# Altium PCB board_2.PcbDoc (part 4 of 4)
Units mm, origin at the board's own origin, x right, y up, seen from the top; angles counter-clockwise.
Board outline 144.25 x 129 mm, 8 copper layers (Top Layer, PWR, Layer2, Layer3, Layer4, Layer5, GND, Bottom Layer); 112 components, 273 nets, 1028 pads, 798 vias.
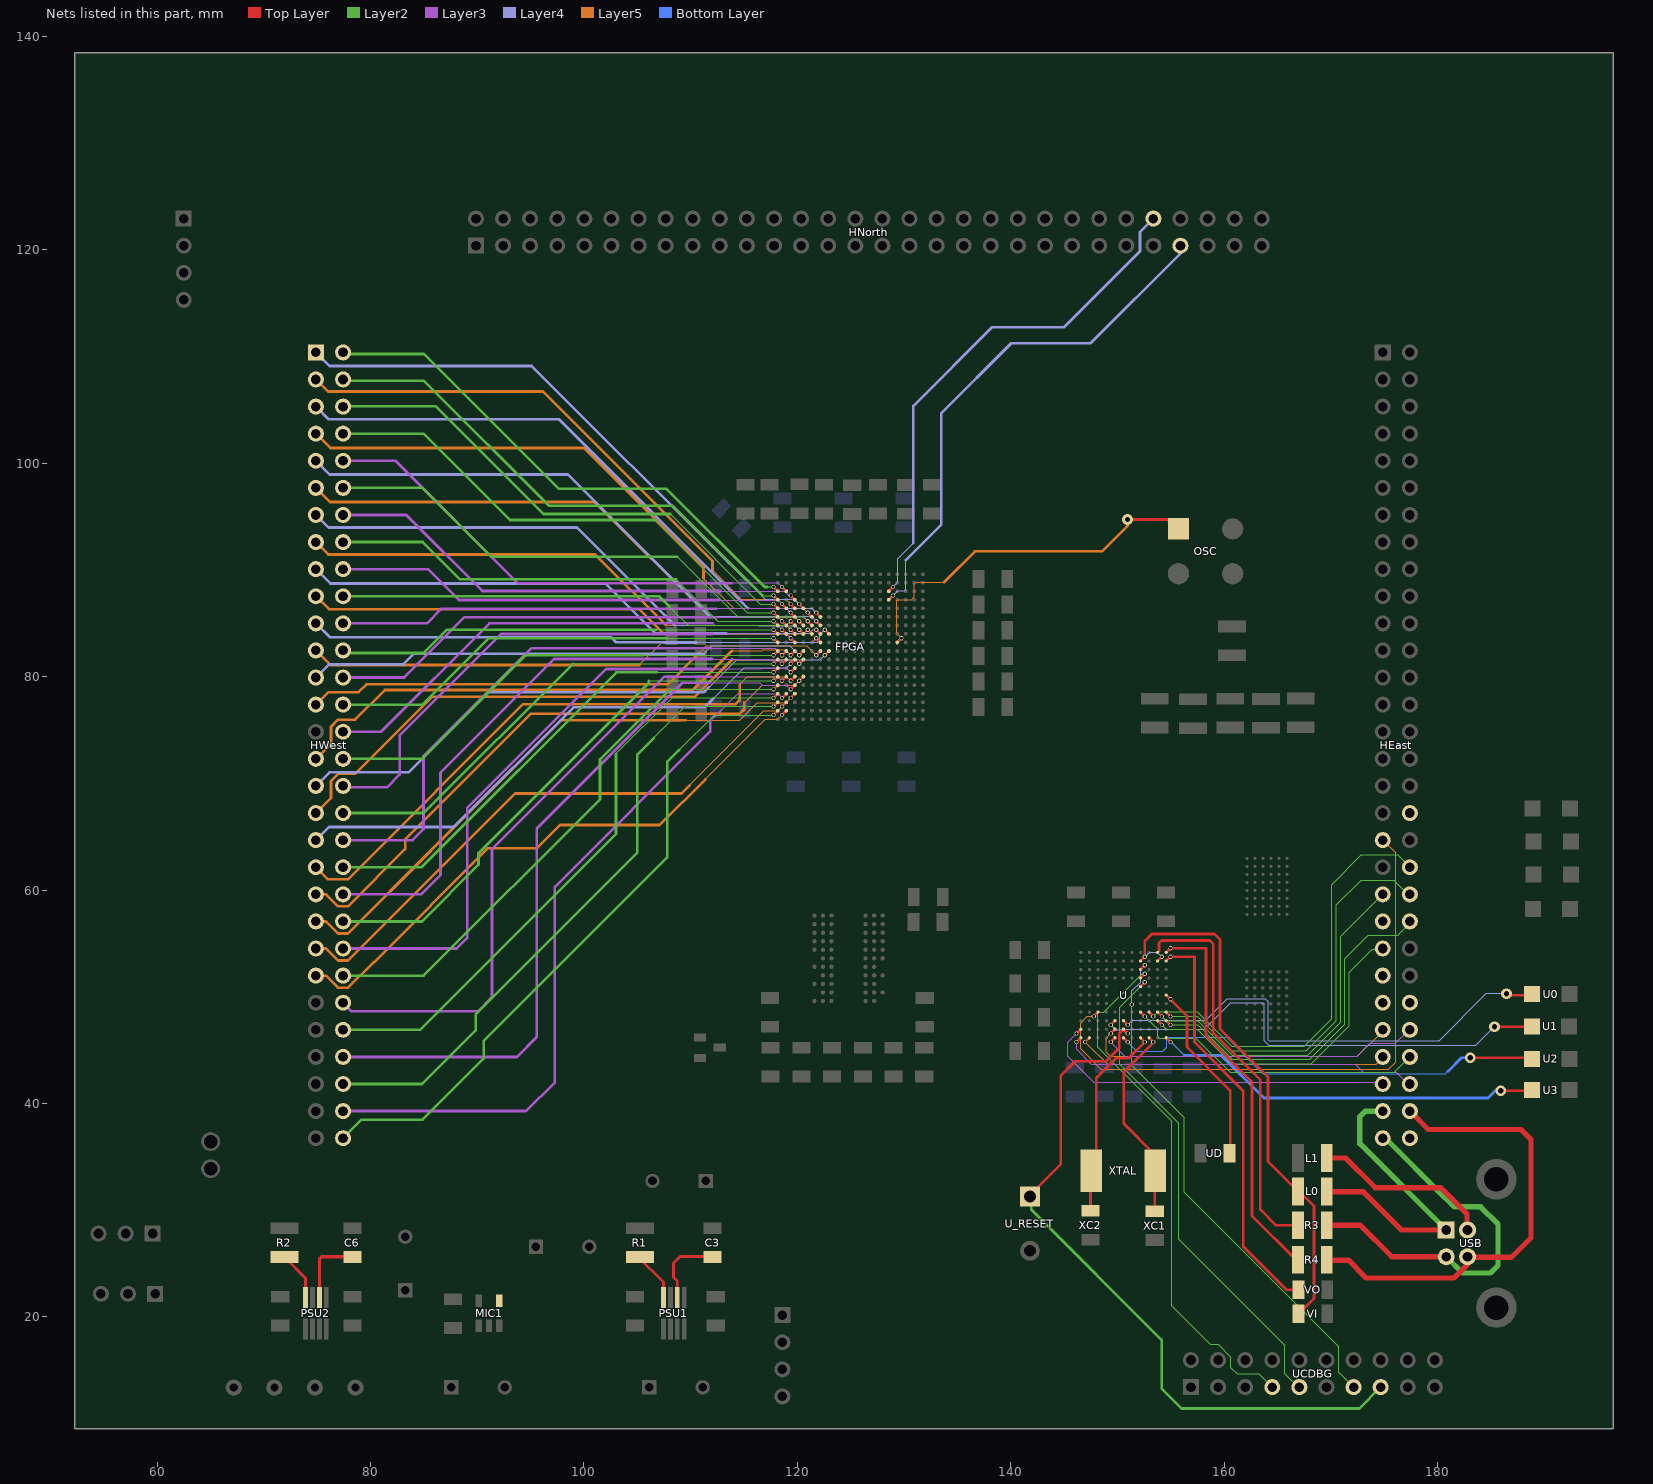
[diagram p10: the nets of this part, all layers, seen from the top]

## Via types
v1: diameter 0.4, hole 0.25, Top Layer to Bottom Layer, tented top, 553 vias
v2: diameter 1, hole 0.5, Top Layer to Bottom Layer, 222 vias
v3: diameter 1.27, hole 0.5, Top Layer to Bottom Layer, 12 vias
v4: diameter 0.4, hole 0.25, Top Layer to Bottom Layer, 7 vias
v5: diameter 7, hole 5, Top Layer to Bottom Layer, 4 vias

## Nets (pads, with @x,y where several pads share a name; then routed paths per layer and width w, separated by ;. In a path a pad name is that pad's centre, name@x,y a point inside that pad or via, vN(x,y) a via of type N, cw(c..) or ccw(c..) an arc to the next point about the centre after c; other vN are vias at no path point) (continued)
HEADERS.HN54: FPGA.P15 HNorth.53 | length 49.4
  Top Layer w0.254: FPGA.P15@128.568,87.204 v1(128.968,87.604)
  Layer4 w0.1: v1(128.968,87.604) 129.414,88.05 130.075,88.05 130.175,88.15 130.175,90.925
  Layer4 w0.254: 130.175,90.925 133.5,94.25 133.5,104.7 140.05,111.25 147.5,111.25 156.075,119.825 HNorth.53@156.075,120.425
HEADERS.HN55: FPGA.P16 HNorth.52 | length 49.2
  Top Layer w0.254: FPGA.P16@128.568,88.004 v1(128.968,88.404)
  Layer4 w0.1: v1(128.968,88.404) 129.4,88.836 129.4,91.05 ; 129.4,91 129.4,91.05 ; 130.875,92.525 129.4,91.05
  Layer4 w0.254: 130.875,92.525 130.875,105.375 138.25,112.75 145,112.75 152.125,119.875 152.125,121.685 HNorth.52@153.376,122.936
HEADERS.HW0: FPGA.A16 HWest.2 | length 50
  Top Layer w0.254: v1(117.768,88.404) FPGA.A16@118.168,88.004
  Layer2 w0.1: 117.2,88.404 v1(117.768,88.404)
  Layer2 w0.254: HWest.2@77.416,110.396 77.562,110.25 85,110.25 97.65,97.6 107.75,97.6 116.946,88.404 117.2,88.404
HEADERS.HW1: FPGA.B16 HWest.10 | length 46.7
  Top Layer w0.254: v1(118.568,88.404) FPGA.B16@118.968,88.004
  Layer3 w0.1: 113.825,88.75 113.875,88.8 118.172,88.8 v1(118.568,88.404)
  Layer3 w0.254: HWest.10@77.416,100.236 82.314,100.236 93.8,88.75 113.825,88.75
HEADERS.HW2: FPGA.C14 HWest.3 | length 54.3
  Top Layer w0.254: v1(119.368,86.804) FPGA.C14@119.768,86.404
  Layer5 w0.1: 112.05,89.95 114.75,87.25 118.922,87.25 v1(119.368,86.804)
  Layer5 w0.254: HWest.3@74.876,107.856 76.007,106.725 96.15,106.725 112.05,90.825 112.05,89.95
HEADERS.HW3: FPGA.D14 HWest.1 | length 55.6
  Top Layer w0.254: v1(120.168,86.804) FPGA.D14@120.568,86.404
  Layer4 w0.1: 113.575,90.65 116.975,87.25 119.722,87.25 v1(120.168,86.804)
  Layer4 w0.254: HWest.1@74.876,110.396 76.147,109.125 95.1,109.125 113.575,90.65
HEADERS.HW4: FPGA.A15 HWest.4 | length 49.2
  Top Layer w0.254: v1(117.768,87.604) FPGA.A15@118.168,87.204
  Layer2 w0.1: 116.721,87.604 v1(117.768,87.604)
  Layer2 w0.254: HWest.4@77.475,107.75 84.975,107.75 96.7,96.025 108.3,96.025 116.721,87.604
HEADERS.HW5: FPGA.C15 HWest.14 | length 45.6
  Top Layer w0.254: v1(119.368,87.604) FPGA.C15@119.768,87.204
  Layer3 w0.1: 112.775,88.025 118.825,88.025 119.246,87.604 v1(119.368,87.604)
  Layer3 w0.254: HWest.14@77.416,95.156 83.344,95.156 90.475,88.025 112.775,88.025
HEADERS.HW6: FPGA.E13 HWest.7 | length 54.2
  Top Layer w0.254: v1(120.968,86.004) FPGA.E13@121.368,85.604
  Layer5 w0.1: 111.2,89.225 114.025,86.4 120.572,86.4 v1(120.968,86.004)
  Layer5 w0.254: HWest.7@74.876,102.776 76.227,101.425 100.025,101.425 111.2,90.25 111.2,89.225
HEADERS.HW7: FPGA.F13 HWest.5 | length 55.5
  Top Layer w0.254: v1(121.768,86.004) FPGA.F13@122.168,85.604
  Layer4 w0.1: 115.375,86.4 121.372,86.4 v1(121.768,86.004)
  Layer4 w0.254: HWest.5@74.876,105.316 76.067,104.125 97.65,104.125 115.375,86.4
HEADERS.HW8: FPGA.A14 HWest.6 | length 48.6
  Top Layer w0.254: v1(117.768,86.804) FPGA.A14@118.168,86.404
  Layer2 w0.1: 108.1,95.25 116.546,86.804 v1(117.768,86.804)
  Layer2 w0.254: HWest.6@77.416,105.35 86.1,105.35 96.2,95.25 108.1,95.25
HEADERS.HW9: FPGA.B14 HWest.18 | length 43.1
  Top Layer w0.254: v1(118.568,86.804) FPGA.B14@118.968,86.404
  Layer3 w0.1: 112.65,87.175 118.197,87.175 v1(118.568,86.804)
  Layer3 w0.254: HWest.18@77.416,90.076 85.374,90.076 88.275,87.175 112.65,87.175
HEADERS.HW10: FPGA.E12 HWest.12 | length 49.3
  Top Layer w0.254: v1(120.968,85.204) FPGA.E12@121.368,84.804
  Layer2 w0.1: 108.75,91.25 114.4,85.6 120.572,85.6 v1(120.968,85.204)
  Layer2 w0.254: HWest.12@77.416,97.696 84.854,97.696 91.3,91.25 108.75,91.25
HEADERS.HW11: FPGA.F12 HWest.9 | length 53.7
  Top Layer w0.254: v1(121.768,85.204) FPGA.F12@122.168,84.804
  Layer4 w0.1: 111.8,85.65 121.322,85.65 v1(121.768,85.204)
  Layer4 w0.254: HWest.9@74.876,100.236 76.162,98.95 98.5,98.95 111.8,85.65
HEADERS.HW12: FPGA.A13 HWest.8 | length 47.9
  Top Layer w0.254: v1(117.768,86.004) FPGA.A13@118.168,85.604
  Layer2 w0.1: 106.65,94.675 115.321,86.004 v1(117.768,86.004)
  Layer2 w0.254: HWest.8@77.416,102.776 84.974,102.776 93.075,94.675 106.65,94.675
HEADERS.HW13: FPGA.C13 HWest.22 | length 43.4
  Top Layer w0.254: v1(119.368,86.004) FPGA.C13@119.768,85.604
  Layer3 w0.1: 112.4,86.375 112.425,86.4 116.425,86.4 ; 116.275,86.4 118.95,86.4 119.346,86.004 v1(119.368,86.004)
  Layer3 w0.254: HWest.22@77.416,84.996 85.271,84.996 86.65,86.375 112.4,86.375
HEADERS.HW14: FPGA.C12 HWest.20 | length 43.8
  Top Layer w0.254: v1(119.368,85.204) FPGA.C12@119.768,84.804
  Layer2 w0.1: 108.05,86.525 109.775,84.8 118.964,84.8 v1(119.368,85.204)
  Layer2 w0.254: HWest.20@77.416,87.536 107.039,87.536 108.05,86.525
HEADERS.HW15: FPGA.D12 HWest.11 | length 51
  Top Layer w0.254: v1(120.168,85.204) FPGA.D12@120.568,84.804
  Layer5 w0.1: 111.8,85.575 119.797,85.575 v1(120.168,85.204)
  Layer5 w0.254: HWest.11@74.876,97.696 76.197,96.375 101,96.375 111.8,85.575
HEADERS.HW16: FPGA.E11 HWest.19 | length 48.3
  Top Layer w0.254: v1(120.968,84.404) FPGA.E11@121.368,84.004
  Layer5 w0.1: 110.175,84.025 120.589,84.025 v1(120.968,84.404)
  Layer5 w0.254: HWest.19@74.876,87.536 76.087,86.325 105.175,86.325 107.475,84.025 110.175,84.025
HEADERS.HW17: FPGA.F11 HWest.17 | length 50.1
  Top Layer w0.254: v1(121.768,84.404) FPGA.F11@122.168,84.004
  Layer4 w0.1: 113.329,84.054 116.489,84.054 116.493,84.05 121.109,84.05 121.463,84.404 v1(121.768,84.404)
  Layer4 w0.254: HWest.17@74.876,90.076 76.227,88.725 102.025,88.725 106.696,84.054 113.329,84.054
HEADERS.HW18: FPGA.A12 HWest.16 | length 44
  Top Layer w0.254: v1(117.768,85.204) FPGA.A12@118.168,84.804
  Layer2 w0.1: 108.625,89.125 112.546,85.204 v1(117.768,85.204)
  Layer2 w0.254: HWest.16@77.416,92.616 84.884,92.616 88.375,89.125 108.625,89.125
HEADERS.HW19: FPGA.B12 HWest.26 | length 44.2
  Top Layer w0.254: v1(118.568,85.204) FPGA.B12@118.968,84.804
  Layer3 w0.1: 112.5,85.575 118.197,85.575 v1(118.568,85.204)
  Layer3 w0.254: HWest.26@77.416,79.916 83.141,79.916 88.8,85.575 112.5,85.575
HEADERS.HW20: FPGA.F10 HWest.23 | length 49.1
  Top Layer w0.254: v1(121.768,83.604) FPGA.F10@122.168,83.204
  Layer5 w0.1: 105.2,81.1 107.329,83.229 116.978,83.229 121.393,83.229 v1(121.768,83.604)
  Layer5 w0.254: HWest.23@74.876,82.456 76.232,81.1 105.2,81.1
HEADERS.HW21: FPGA.G11 HWest.21 | length 49.8
  Top Layer w0.254: v1(122.568,84.404) FPGA.G11@122.968,84.004
  Layer4 w0.1: 110.475,83.2 110.504,83.229 121.888,83.229 122.118,83.459 122.118,83.954 v1(122.568,84.404)
  Layer4 w0.254: HWest.21@74.876,84.996 76.172,83.7 102.525,83.7 103,83.225 107.45,83.225 107.475,83.2 110.475,83.2
HEADERS.HW22: FPGA.A11 HWest.24 | length 41.9
  Top Layer w0.254: v1(117.768,84.404) FPGA.A11@118.168,84.004
  Layer2 w0.1: 106.779,84.404 v1(117.768,84.404)
  Layer2 w0.254: HWest.24@77.416,82.456 77.647,82.225 84.975,82.225 87.154,84.404 106.779,84.404
HEADERS.HW23: FPGA.B11 HWest.30 | length 46.2
  Top Layer w0.254: v1(118.568,84.404) FPGA.B11@118.968,84.004
  Layer3 w0.1: 112.075,85 112.275,84.8 116.75,84.8 118.172,84.8 v1(118.568,84.404)
  Layer3 w0.254: HWest.30@77.416,74.836 80.986,74.836 91.15,85 112.075,85
HEADERS.HW24: FPGA.F9 HWest.27 | length 50.1
  Top Layer w0.254: v1(121.768,82.004) FPGA.F9@122.168,82.404
  Layer5 w0.1: 110.8,82.2 111.475,82.875 120.897,82.875 v1(121.768,82.004)
  Layer5 w0.254: HWest.27@74.876,77.376 75.582,78.082 76.05,78.55 78.875,78.55 79.6,79.275 107.875,79.275 110.8,82.2
HEADERS.HW25: FPGA.G9 HWest.33 | length 53.3
  Top Layer w0.254: v1(122.568,82.004) FPGA.G9@122.968,82.404
  Layer4 w0.1: 111.675,78.975 114.3,81.6 122.164,81.6 v1(122.568,82.004)
  Layer4 w0.254: HWest.33@74.876,69.756 76.145,71.025 83.55,71.025 91.05,78.525 111.225,78.525 111.675,78.975
HEADERS.HW26: FPGA.A10 HWest.28 | length 43.5
  Top Layer w0.254: v1(117.768,83.604) FPGA.A10@118.168,83.204
  Layer2 w0.1: 107.804,83.604 v1(117.768,83.604)
  Layer2 w0.254: HWest.28@77.416,77.376 84.876,77.376 91.104,83.604 107.804,83.604
HEADERS.HW27: FPGA.C10 HWest.34 | length 50.6
  Top Layer w0.254: v1(119.368,83.604) FPGA.C10@119.768,83.204
  Layer3 w0.1: 112.05,84 118.972,84 v1(119.368,83.604)
  Layer3 w0.254: HWest.34@77.6,69.625 81.525,69.625 82.725,70.825 82.725,74.5 92.225,84 112.05,84
HEADERS.HW28: FPGA.C11 HWest.15 | length 48.5
  Top Layer w0.254: v1(119.368,84.404) FPGA.C11@119.768,84.004
  Layer5 w0.1: 107.675,84.825 118.947,84.825 v1(119.368,84.404)
  Layer5 w0.254: HWest.15@74.876,92.616 76.042,91.45 101.05,91.45 107.675,84.825
HEADERS.HW29: FPGA.D11 HWest.13 | length 50.3
  Top Layer w0.254: v1(120.168,84.404) FPGA.D11@120.568,84.004
  Layer4 w0.1: 108.525,84.8 116.425,84.8 116.45,84.775 119.797,84.775 v1(120.168,84.404)
  Layer4 w0.254: HWest.13@74.876,95.156 76.057,93.975 99.35,93.975 108.525,84.8
HEADERS.HW30: FPGA.A9 HWest.32 | length 44.9
  Top Layer w0.254: v1(117.768,82.004) FPGA.A9@118.168,82.404
  Layer2 w0.1: 105.529,82.004 v1(117.768,82.004)
  Layer2 w0.254: HWest.32@77.416,72.296 84.821,72.296 94.529,82.004 105.529,82.004
HEADERS.HW31: FPGA.B9 HWest.38 | length 53.4
  Top Layer w0.254: v1(118.568,82.004) FPGA.B9@118.968,82.404
  Layer3 w0.1: 111.875,82.65 117.922,82.65 118.172,82.4 v1(118.568,82.004)
  Layer3 w0.254: HWest.38@77.416,64.676 83.926,64.676 84.95,65.7 84.95,72.55 95.05,82.65 111.875,82.65
HEADERS.HW32: FPGA.C9 HWest.31 | length 50.4
  Top Layer w0.254: v1(119.368,82.004) FPGA.C9@119.768,82.404
  Layer5 w0.1: 113.875,82.425 116.7,82.425 116.775,82.5 118.872,82.5 v1(119.368,82.004)
  Layer5 w0.254: HWest.31@74.876,72.296 76.285,73.705 76.285,75.304 76.947,75.967 78.547,75.967 81.33,78.75 110.2,78.75 113.875,82.425
HEADERS.HW33: FPGA.D9 HWest.25 | length 47.4
  Top Layer w0.254: v1(120.168,82.004) FPGA.D9@120.568,82.404
  Layer4 w0.1: 111.221,82.15 111.946,82.875 119.297,82.875 v1(120.168,82.004)
  Layer4 w0.254: HWest.25@74.876,79.916 76.135,81.175 83.075,81.175 84.05,82.15 111.221,82.15
HEADERS.HW34: FPGA.A8 HWest.36 | length 46.7
  Top Layer w0.254: v1(117.768,81.204) FPGA.A8@118.168,81.604
  Layer2 w0.1: 98.954,81.204 v1(117.768,81.204)
  Layer2 w0.254: HWest.36@77.416,67.216 84.966,67.216 98.954,81.204
HEADERS.HW35: FPGA.B8 HWest.42 | length 56.6
  Top Layer w0.254: v1(118.568,81.204) FPGA.B8@118.968,81.604
  Layer3 w0.1: 112,81.65 118.122,81.65 v1(118.568,81.204)
  Layer3 w0.254: HWest.42@77.416,59.596 84.721,59.596 86.55,61.425 86.55,71 97.2,81.65 112,81.65
HEADERS.HW36: FPGA.C8 HWest.37 | length 51.9
  Top Layer w0.254: v1(119.368,81.204) FPGA.C8@119.768,81.604
  Layer4 w0.1: 112.15,77.975 115.025,80.85 119.014,80.85 v1(119.368,81.204)
  Layer4 w0.254: HWest.37@74.876,64.676 76.1,65.9 87.775,65.9 99,77.125 111.3,77.125 112.15,77.975
HEADERS.HW37: FPGA.D8 HWest.35 | length 52.9
  Top Layer w0.254: v1(120.168,81.204) FPGA.D8@120.568,81.604
  Layer5 w0.1: 113.9,81.6 119.772,81.6 v1(120.168,81.204)
  Layer5 w0.254: HWest.35@74.876,67.216 76.285,68.625 76.285,70.224 76.947,70.887 78.547,70.887 85.785,78.125 110.425,78.125 113.9,81.6
HEADERS.HW38: FPGA.A7 HWest.40 | length 48.5
  Top Layer w0.254: v1(117.768,80.404) FPGA.A7@118.168,80.804
  Layer2 w0.1: 106.821,80.404 v1(117.768,80.404)
  Layer2 w0.254: HWest.40@77.416,62.136 84.776,62.136 103.044,80.404 106.821,80.404
HEADERS.HW39: FPGA.C7 HWest.46 | length 60.7
  Top Layer w0.254: v1(119.368,80.404) FPGA.C7@119.768,80.804
  Layer3 w0.1: 111.925,80.725 116.575,80.725 116.625,80.775 118.997,80.775 v1(119.368,80.404)
  Layer3 w0.254: HWest.46@77.416,54.516 88.066,54.516 89.05,55.5 89.05,67.7 102.075,80.725 111.925,80.725
HEADERS.HW40: FPGA.A6 HWest.44 | length 51
  Top Layer w0.254: v1(117.768,79.604) FPGA.A6@118.168,80.004
  Layer2 w0.1: 106.071,79.604 v1(117.768,79.604)
  Layer2 w0.254: HWest.44@77.416,57.056 84.806,57.056 90.122,62.372 90.122,63.447 106.071,79.396 106.071,79.604
HEADERS.HW41: FPGA.B6 HWest.50 | length 63.3
  Top Layer w0.254: v1(118.568,79.604) FPGA.B6@118.968,80.004
  Layer3 w0.1: 111.925,80 118.172,80 v1(118.568,79.604)
  Layer3 w0.254: HWest.50@77.416,49.436 78.227,48.625 90.05,48.625 91.375,49.95 91.375,63.825 107.55,80 111.925,80
HEADERS.HW42: FPGA.A5 HWest.48 | length 54.2
  Top Layer w0.254: v1(117.768,78.804) FPGA.A5@118.168,79.204
  Layer2 w0.1: 108.054,78.804 v1(117.768,78.804)
  Layer2 w0.254: HWest.48@77.416,51.976 84.976,51.976 101.5,68.5 101.5,72.25 108.054,78.804
HEADERS.HW43: FPGA.C5 HWest.54 | length 68.7
  Top Layer w0.254: v1(119.368,78.804) FPGA.C5@119.768,79.204
  Layer3 w0.1: 111.8,79.425 116.475,79.425 116.7,79.2 118.972,79.2 v1(119.368,78.804)
  Layer3 w0.254: HWest.54@77.416,44.356 93.706,44.356 95.575,46.225 95.575,65.75 109.25,79.425 111.8,79.425
HEADERS.HW44: FPGA.A4 HWest.52 | length 58.2
  Top Layer w0.254: v1(117.768,78.004) FPGA.A4@118.168,78.404
  Layer2 w0.1: 103,72.75 108.254,78.004 v1(117.768,78.004)
  Layer2 w0.254: HWest.52@77.416,46.896 84.646,46.896 103,65.25 103,72.75
HEADERS.HW45: FPGA.B4 HWest.58 | length 69.4
  Top Layer w0.254: v1(118.568,78.004) FPGA.B4@118.968,78.404
  Layer3 w0.1: 111.825,75.8 114.4,78.375 118.197,78.375 v1(118.568,78.004)
  Layer3 w0.254: HWest.58@77.416,39.276 94.576,39.276 97.275,41.975 97.275,60.3 111.825,74.85 111.825,75.8
HEADERS.HW46: FPGA.A3 HWest.56 | length 61.8
  Top Layer w0.254: v1(117.768,77.204) FPGA.A3@118.168,77.604
  Layer2 w0.1: 106.55,74.25 109.504,77.204 v1(117.768,77.204)
  Layer2 w0.254: HWest.56@77.416,41.816 84.816,41.816 89.862,46.862 89.862,48.362 105,63.5 105,72.7 106.55,74.25
HEADERS.HW47: FPGA.B3 HWest.45 | length 54.6
  Top Layer w0.254: v1(118.568,77.204) FPGA.B3@118.968,77.604
  Layer5 w0.1: 109.9,69.8 109.9,69.85 116.85,76.8 118.164,76.8 v1(118.568,77.204)
  Layer5 w0.254: HWest.45@74.876,54.516 75.816,54.516 76.947,53.385 77.884,53.385 83.324,58.825 93.55,69.05 109.15,69.05 109.9,69.8
HEADERS.HW48: FPGA.C6 HWest.39 | length 54.4
  Top Layer w0.254: v1(119.368,79.604) FPGA.C6@119.768,80.004
  Layer5 w0.1: 114.6,79.3 115.3,80 118.972,80 v1(119.368,79.604)
  Layer5 w0.254: HWest.39@74.876,62.136 76.007,61.005 77.884,61.005 94.304,77.425 105.425,77.425 114.207,77.425 114.6,77.818 114.6,79.3
HEADERS.HW49: FPGA.D6 HWest.41 | length 55.9
  Top Layer w0.254: v1(120.168,79.604) FPGA.D6@120.568,80.004
  Layer5 w0.1: 115.025,77.525 116.7,79.2 119.764,79.2 v1(120.168,79.604)
  Layer5 w0.254: HWest.41@74.876,59.596 75.816,59.596 76.947,58.465 77.884,58.465 83.244,63.825 83.244,64.719 95.05,76.525 114.607,76.525 115.025,76.943 115.025,77.525
HEADERS.HW50: FPGA.A2 HWest.60 | length 63.6
  Top Layer w0.254: v1(117.768,76.404) FPGA.A2@118.168,76.804
  Layer2 w0.1: 108.925,73.125 112.204,76.404 v1(117.768,76.404)
  Layer2 w0.254: HWest.60@77.416,36.736 79.155,38.475 84.869,38.475 90.602,44.208 90.602,45.852 107.8,63.05 107.8,72 108.925,73.125
HEADERS.HW51: FPGA.B2 HWest.47 | length 55.3
  Top Layer w0.254: v1(118.568,76.404) FPGA.B2@118.968,76.804
  Layer5 w0.1: 111.375,70.375 117,76 118.164,76 v1(118.568,76.404)
  Layer5 w0.254: HWest.47@74.876,51.976 75.816,51.976 76.947,50.845 77.884,50.845 80.264,53.225 80.3,53.225 91,63.925 95.6,63.925 97.763,66.088 107.087,66.088 111.375,70.375
HEADERS.HW52: FPGA.C4 HWest.43 | length 54.7
  Top Layer w0.254: v1(119.368,78.004) FPGA.C4@119.768,78.404
  Layer5 w0.1: 109.525,75.9 114.591,75.9 116.266,77.575 118.939,77.575 v1(119.368,78.004)
  Layer5 w0.254: HWest.43@74.876,57.056 75.816,57.056 76.947,55.925 77.884,55.925 85.684,63.725 85.684,63.734 97.85,75.9 109.525,75.9
LED0: U1.1 U.J5 | length 45.8
  Top Layer w0.254: v1(149.375,47.35) U.J5@149.775,47.75 ; v2(185.35,47.175) U1.1@188.875,47.175
  Layer4 w0.1: v1(149.375,47.35) 149.825,46.9 150.175,46.9 150.225,46.95 158.15,46.95 160.65,49.45 163.6,49.45 163.775,49.275 163.775,45.85 164.2,45.425 183.6,45.425 v2(185.35,47.175)
  Bottom Layer w0.1: v1@149.375,47.25 v1(149.375,47.35)
LED1: U2.1 U.L6 | length 41.5
  Top Layer w0.254: U.L6@150.575,46.15 v1(150.975,45.75) ; v2(183.077,44.275) U2.1@188.775,44.275
  Bottom Layer w0.1: v1(150.975,45.75) 151.825,44.9 154.25,44.9 154.625,45.275 154.625,45.925 154.875,46.175 160.275,46.175 163.65,42.8 180.775,42.8 180.925,42.95
  Bottom Layer w0.254: 181,43 182.275,44.275 v2(183.077,44.275)
LED2: U0.1 U.J6 | length 45.5
  Top Layer w0.254: U.J6@150.575,47.75 v1(150.975,47.35) ; v2(186.475,50.275) 186.625,50.125 U0.1@189.2,50.125
  Layer4 w0.1: v1(150.975,47.35) 151.425,47.8 158.3,47.8 160.3,49.8 163.875,49.8 164.15,49.525 164.15,45.925 164.225,45.85 180.15,45.85 184.6,50.3 v2@186.55,50.3
LED3: U3.1 U.L11 | length 36.9
  Top Layer w0.254: U.L11@154.575,46.15 v1(154.975,45.75) ; v2(185.925,41.175) U3.1@188.75,41.175
  Bottom Layer w0.1: v1@155,45.775 156.262,44.512
  Bottom Layer w0.254: 156.262,44.512 159.738,44.512 163.75,40.5 184.75,40.5 185.5,41.25 v2@186,41.25
MISC0: HEast.36 | length 0.1
  Layer4 w0.1: HEast.36@177.35,67.15 HEast.36@177.416,67.216
MISC1: HEast.52 U.L5 | length 30.1
  Top Layer w0.254: v1(149.375,45.75) U.L5@149.775,46.15
  Layer3 w0.1: v1(149.375,45.75) 150.7,44.425 172.475,44.425 173.675,45.625 176.05,45.625 HEast.52@177.3,46.875
MISC2: HEast.56 U.L1 | length 33.9
  Top Layer w0.254: v1(146.175,45.75) U.L1@146.575,46.15
  Layer3 w0.1: v1(146.175,45.75) 146.175,45.05 147.575,43.65 172.275,43.65 173.025,42.9 176.15,42.9 HEast.56@177.4,41.65
MISC3: HEast.55 U.K1 | length 33.7
  Top Layer w0.254: v1(146.175,46.55) U.K1@146.575,46.95
  Layer3 w0.1: v1(146.175,46.55) 145.35,45.725 145.35,44.4 147.775,41.975 174.675,41.975 HEast.55@174.925,41.725
MISC4: HEast.51 U.K5 | length 29.6
  Top Layer w0.254: v1(149.375,46.55) U.K5@149.775,46.95
  Layer5 w0.1: v1(149.375,46.55) 148.95,46.125 148.95,44.8 149.35,44.4 172.5,44.4 HEast.51@174.875,46.775
MISC8: HEast.37 U.H3 | length 56.3
  Top Layer w0.254: v1(147.775,48.15) U.H3@148.175,48.55
  Layer5 w0.1: v1(147.775,48.15) 147.2,48.15 146.55,47.5 146.55,45.1 148.45,43.2 175.4,43.2 176.075,43.875 176.075,63.475 HEast.37@174.875,64.675
MISC10: HEast.54 U.H8 | length 28.7
  Top Layer w0.254: U.H8@152.175,48.55 v1(152.575,48.15)
  Layer2 w0.1: v1(152.575,48.15) 153.775,46.95 153.775,46.275 153.925,46.125 157.35,46.125 160.575,42.9 175.975,42.9 HEast.54@177.475,44.4
MISC11: HEast.42 U.H11 | length 37.8
  Top Layer w0.254: U.H11@154.575,48.55 v1(154.975,48.15)
  Layer2 w0.1: v1(154.975,48.15) 157.5,48.15 160.725,44.925 167.686,44.925 170.525,47.764 170.525,58.6 172.85,60.925 175.925,60.925 HEast.42@177.325,59.525
MISC12: HEast.41 U.H10 | length 33.8
  Top Layer w0.254: U.H10@153.775,48.55 v1(154.175,48.15)
  Layer2 w0.1: v1(154.175,48.15) 154.6,47.725 157.525,47.725 160.75,44.5 167.862,44.5 170.95,47.588 170.95,55.67 HEast.41@174.876,59.596
MISC13: HEast.40 U.H9 | length 41.4
  Top Layer w0.254: U.H9@152.975,48.55 v1(153.375,48.15)
  Layer2 w0.1: v1(153.375,48.15) 153.825,48.6 157.5,48.6 160.725,45.375 167.5,45.375 170.075,47.95 170.075,60.5 172.875,63.3 176.275,63.3 HEast.40@177.45,62.125
MISC14: HEast.44 U.J11 | length 33.5
  Top Layer w0.254: U.J11@154.575,47.75 v1(154.975,47.35)
  Layer3 w0.1: v1(154.975,47.35) v1@155.05,47.275
  Layer2 w0.1: v1(154.975,47.35) 157.525,47.35 160.75,44.125 168.018,44.125 171.325,47.432 171.325,53.55 173.525,55.75 176.275,55.75 HEast.44@177.525,57
MISC15: HEast.45 U.J10 | length 30.2
  Top Layer w0.254: U.J10@153.775,47.75 v1(154.175,47.35)
  Layer2 w0.1: v1(154.175,47.35) 154.575,46.95 157.5,46.95 160.725,43.725 168.183,43.725 171.725,47.267 171.725,52.275 173.875,54.425 HEast.45@174.9,54.425
MISC16: HEast.53 U.L2 | length 29.7
  Top Layer w0.254: v1(146.975,45.75) U.L2@147.375,46.15
  Layer5 w0.1: v1(146.975,45.75) 149.075,43.65 174.25,43.65 HEast.53@174.975,44.375
MISC18: HEast.50
MISC19: HEast.43
MISC21: HEast.49
MISC23: HEast.47
MISC24: HEast.60
MISC25: HEast.57 L0.2 USB.1 | length 29.4
  Top Layer w0.5: L0.2@169.525,31.7 173.075,31.7 176.65,28.125 USB.1@180.825,28.125
  Layer2 w0.1: HEast.57@174.625,39 HEast.57@174.875,39.25
  Layer2 w0.5: HEast.57@174.85,39.25 173.225,39.25 172.725,38.75 172.725,36.225 USB.1@180.825,28.125
MISC26: HEast.59 R3.2 USB.2 | length 36.4
  Top Layer w0.5: R3.2@169.625,28.57 172.78,28.57 175.725,25.625 USB.2@180.825,25.625 USB.2@180.925,25.625
  Layer2 w0.5: HEast.59@174.825,36.775 175.075,36.775 180.725,31.125 180.825,31.125 ; 180.8,31.1 181.6,30.3 184.05,30.3 185.675,28.675 185.675,24.8 184.975,24.1 182.35,24.1 USB.2@180.825,25.625
MISC27: HEast.58 R4.2 USB.3 | length 43.6
  Top Layer w0.5: R4.2@169.525,25.3 171.65,25.3 173.325,23.625 181.55,23.625 182.825,24.9 182.825,25.575 186.95,25.575 188.775,27.4 188.775,36.625 187.85,37.55 179.142,37.55 HEast.58@177.416,39.276
NetC3_2: C3.2 PSU1.6 | length 7.5
  Top Layer w0.254: PSU1.6@108.75,21.525 108.75,23.35 108.4,23.7 108.4,25.025 109.025,25.65 C3.2@112,25.65
NetC6_2: C6.2 PSU2.6 | length 6.9
  Top Layer w0.305: PSU2.6@75.2,21.525 75.2,25.4 75.425,25.625 C6.2@78.175,25.625
NetFPGA_R10: FPGA.R10 OSC.3 | length 35.3
  Top Layer w0.254: FPGA.R10@129.368,83.204 v1(129.768,83.604) ; v2(150.95,94.725) 154.65,94.725 OSC.3@155.7,93.675
  Layer5 w0.1: v1(129.768,83.604) 129.325,84.047 129.325,87.15 129.4,87.225 130.725,87.225 130.975,87.475 130.975,88.65 131.175,88.85 133.75,88.85
  Layer5 w0.254: 133.75,88.85 136.65,91.75 148.575,91.75 150.95,94.125 v2(150.95,94.725)
NetL1_2: L1.2 USB.4 | length 16.9
  Top Layer w0.5: L1.2@169.625,34.875 171.4,34.875 174.175,32.1 180.3,32.1 182.775,29.625 USB.4@182.775,28.075
NetMIC1_4: MIC1.4
NetPSU1_8: PSU1.8 R1.1 | length 4.9
  Top Layer w0.254: R1.1@105.175,25.525 107.45,23.25 PSU1.8@107.45,21.525
NetPSU2_8: PSU2.8 R2.1 | length 4.6
  Top Layer w0.305: R2.1@71.927,25.6 73.9,23.627 PSU2.8@73.9,21.8
NetU_L8: U.L8 XC2.1 XTAL.2 | length 16.3
  Top Layer w0.254: XC2.1@147.475,29.925 147.475,32.225 XTAL.2@147.525,32.275 ; XTAL.2@147.575,35.1 148.019,35.544 148.019,42.369 149.881,44.231 151.056,44.231 v1(152.575,45.75) U.L8@152.175,46.15
NetU_L9: U.L9 XC1.1 XTAL.1 | length 18.7
  Top Layer w0.254: U.L9@152.975,46.15 v1(153.375,45.75) ; v1@153.4,45.725 153.375,45.725 150.6,42.95 150.6,38.1 153.45,35.25 153.45,33.625 153.5,33.675 XTAL.1@153.55,33.675 ; XC1.1@153.5,29.9 XTAL.1@153.5,33.5
PSU_DECOUPLE: U.F11 UD.2 | length 17.4
  Top Layer w0.254: U.F11@154.575,50.15 v1(154.975,49.75) 156.525,48.2 156.525,45.275 160.575,41.225 UD.2@160.575,35.275
SWCLK: U.E8 UCDBG.9 | length 46.6
  Top Layer w0.254: U.E8@152.175,50.95 v1(152.575,51.35)
  Layer2 w0.1: v1(152.575,51.35) 150.225,49 150.225,43.675 155.75,38.15 155.75,27.275 165.7,17.325 165.7,14.65 UCDBG.9@167.075,13.275
SWDIO: U.D8 UCDBG.7 | length 50
  Top Layer w0.254: U.D8@152.175,51.75 v1(152.575,52.15)
  Layer2 w0.1: v1(152.575,52.15) 152.35,52.15 148.725,48.525 148.275,48.525 148.15,48.4 148.15,45.275 155.1,38.325 155.1,21.025 158.725,17.4 159.475,17.4 160.65,16.225 160.65,15.225 161.225,14.65 163.275,14.65 UCDBG.7@164.575,13.35
SWO: U.C8 UCDBG.13 | length 49.3
  Top Layer w0.254: U.C8@152.175,52.55 v1(152.575,52.95)
  Layer2 w0.1: v4(151.35,49.275) 151.35,43.575 156.275,38.65 156.275,31.675 170.75,17.2 170.75,14.79 UCDBG.13@172.14,13.4
  Layer5 w0.254: UCDBG.13@172.207,13.333 UCDBG.13@172.225,13.35
  Layer4 w0.1: v4(151.35,49.275) 151.35,50.55 152.175,51.375 152.175,52.525 v1@152.6,52.95
U_RESET: U.K6 U_RESET.1 UCDBG.15 | length 66.9
  Top Layer w0.254: U_RESET.1@141.875,31.1 141.875,31.475 144.7,34.3 144.7,42.6 146.05,43.95 148.95,43.95 150.175,45.175 150.175,46.55 U.K6@150.575,46.95 v1(150.975,46.55)
  Layer2 w0.254: U_RESET.1@141.925,31.25 141.925,30.05 154.15,17.825 154.15,13.275 156.025,11.4 172.68,11.4 UCDBG.15@174.68,13.4
USB_DM: R3.1 U.A10 | length 37.1
  Top Layer w0.254: U.A10@153.775,54.15 153.9,54.275 153.9,55.025 154.15,55.275 155.425,55.275 ; 155.45,55.275 158.675,55.275 159,54.95 159,46.6 163.4,42.2 163.4,30.05 164.88,28.57 R3.1@166.925,28.57
USB_DP: R4.1 U.A11 | length 36.7
  Top Layer w0.254: U.A11@154.575,54.15 v1(154.975,54.55) 158.3,54.55 158.3,46.325 162.625,42 162.625,29.45 R4.1@166.825,25.25
USB_VBUS: L0.1 U.B8 U.B10 VI.1 | length 51.5
  Top Layer w0.254: U.B8@152.175,53.35 v1(152.575,53.75) 152.575,55.225 153.225,55.875 159.1,55.875 159.625,55.35 159.625,46.975 164.125,42.475 164.125,34.55 L0.1@166.887,31.788 ; U.B10@153.775,53.35 v1(154.175,53.75) ; L0.1@166.95,31.85 168.425,30.375 168.425,21.725 VI.1@166.975,20.275
  Layer4 w0.1: v1(152.575,53.75) 152.625,53.75 153.05,54.175 153.75,54.175 v1(154.175,53.75)
USB_VREG0: U.B11 VO.1 | length 38.8
  Top Layer w0.254: U.B11@154.575,53.35 v1(154.975,53.75) 157.225,53.75 157.225,45.75 161.8,41.175 161.8,26.6 165.875,22.525 VO.1@166.975,22.525 VO.1@167.025,22.525
pads on no net: DDR.A2 DDR.L3 DDR.L7 FPGA.C2 FPGA.E4 FPGA.E6 FPGA.E7 FPGA.E8 FPGA.F5 FPGA.F7 FPGA.F8 FPGA.G8 FPGA.K4 FPGA.P4 FPGA.P13 HEast.22 HEast.29 HEast.30 HEast.38 HEast.39 HEast.46 HEast.48 HWest.29 HWest.57 HWest.59 SR1.E3 SR2.E3 U.A6 U.A7 U.A8 U.B7 U.C4 U.C11 U.D3 U.E11 U.F10 U.G2 U.H1 U.H2 U.J1 U.J9 U.K2 U.K11 UCDBG.2 UCDBG.3 UCDBG.5 UCDBG.11 UCDBG.17 UCDBG.19 USB.5 USB.6
copper on no net:
  other v5: 59.75,14.75 190,14.75 59.75,132.5 190,132.5

## Polygon pours and split planes (outlines as drawn)
GND on Bottom Layer "Top Layer-No Net1" (solid, pour order 8): 52.25,138.5 196.5,138.5 196.5,9.5 52.25,9.5
GND on Top Layer "Top Layer-No Net" (solid, pour order 6): 52.25,138.5 196.5,138.5 196.5,9.5 52.25,9.5
1V8 on PWR (split plane): 125.408,79.133 125.45,79.105 125.5,79.096 128.196,79.096 128.496,78.796 128.496,77.875 128.505,77.825 128.533,77.783 128.758,77.558 128.8,77.53 128.85,77.521 130.546,77.521 130.821,77.246 130.821,75.175 130.83,75.125 130.858,75.083 131.183,74.758 131.225,74.73 131.275,74.721 136.571,74.721 136.571,67.579 134.383,65.392 134.355,65.35 134.346,65.3 134.346,59.025 134.346,58.325 134.346,54.9 134.355,54.85 134.383,54.808 136.471,52.721 136.471,38.479 133.896,35.904 123.125,35.904 123.075,35.895 123.033,35.867 115.333,28.167 115.305,28.125 115.296,28.075 115.296,27.675 115.296,20.629 101.804,20.629 101.804,32.746 106.986,37.928 107,37.93 107.042,37.958 113.192,44.108 113.22,44.15 113.229,44.2 113.229,57.35 113.229,60.121 117.492,64.383 117.52,64.425 117.529,64.475 117.529,73.771 118.179,74.421 119.2,74.421 119.25,74.43 119.292,74.458 119.892,75.058 119.92,75.1 119.929,75.15 119.929,76.421 121.754,78.246 121.925,78.246 121.975,78.255 122.017,78.283 122.242,78.508 122.27,78.55 122.279,78.6 122.279,79.671 122.479,79.871 124.671,79.871
3V3 on PWR (split plane): 195.99,10.01 115.654,10.01 115.654,20.425 115.645,20.475 115.617,20.517 115.575,20.545 115.554,20.549 115.554,27.675 115.554,28.021 123.179,35.646 133.95,35.646 134,35.655 134.042,35.683 136.692,38.333 136.72,38.375 136.729,38.425 136.729,52.775 136.72,52.825 136.692,52.867 134.604,54.954 134.604,59.025 134.604,65.246 136.792,67.433 136.82,67.475 136.829,67.525 136.829,74.825 136.82,74.875 136.792,74.917 136.777,74.927 136.767,74.942 136.725,74.97 136.675,74.979 131.329,74.979 131.079,75.229 131.079,77.3 131.07,77.35 131.042,77.392 130.692,77.742 130.65,77.77 130.6,77.779 128.904,77.779 128.754,77.929 128.754,78.85 128.745,78.9 128.717,78.942 128.342,79.317 128.3,79.345 128.25,79.354 125.554,79.354 124.817,80.092 124.775,80.12 124.725,80.129 122.425,80.129 122.375,80.12 122.333,80.092 122.058,79.817 122.03,79.775 122.021,79.725 122.021,78.654 121.871,78.504 121.7,78.504 121.65,78.495 121.608,78.467 119.708,76.567 119.68,76.525 119.671,76.475 119.671,75.204 119.146,74.679 118.125,74.679 118.075,74.67 118.033,74.642 117.308,73.917 117.28,73.875 117.271,73.825 117.271,64.529 113.008,60.267 112.98,60.225 112.971,60.175 112.971,57.35 112.971,57.125 112.971,44.254 107.089,38.372 107.075,38.37 107.033,38.342 101.583,32.892 101.555,32.85 101.546,32.8 101.546,32.775 101.546,20.5 101.555,20.45 101.583,20.408 101.589,20.404 70.554,20.404 70.229,20.729 70.229,28.975 70.22,29.025 70.192,29.067 68.692,30.567 68.65,30.595 68.6,30.604 52.76,30.604 52.76,137.99 195.99,137.99
5V0 on PWR (split plane): 69.971,28.921 69.971,20.675 69.98,20.625 70.008,20.583 70.408,20.183 70.45,20.155 70.5,20.146 102.975,20.146 103.025,20.155 103.067,20.183 103.095,20.225 103.104,20.275 103.1,20.296 115.396,20.296 115.396,10.01 52.76,10.01 52.76,30.346 68.546,30.346
GND on GND (split plane): 196.5,9.5 52.25,9.5 52.25,138.5 196.5,138.5

## Other copper
PWR (plane layer: these items are gaps in the copper):
  lines w0.254: 52.25,30.475 68.6,30.475 70.1,28.975 70.1,20.675 70.5,20.275 102.975,20.275 ; 102.825,20.275 102.975,20.425 115.525,20.425 115.525,9.5 ; 106.95,38.05 113.1,44.2 113.1,57.35 ; 107.125,38.25 101.675,32.8 101.675,32.775 101.675,20.5 115.425,20.5 115.425,27.675 115.425,28.075 123.125,35.775 133.95,35.775 136.6,38.425 136.6,52.775 134.475,54.9 134.475,59.025 ; 113.1,57.125 113.1,60.175 117.4,64.475 117.4,73.825 118.125,74.55 119.2,74.55 119.8,75.15 119.8,76.475 121.7,78.375 121.925,78.375 122.15,78.6 122.15,79.725 122.425,80 124.725,80 125.5,79.225 128.25,79.225 128.625,78.85 128.625,77.875 128.85,77.65 130.6,77.65 130.95,77.3 130.95,75.175 131.275,74.85 131.925,74.85 136.675,74.85 ; 134.475,58.325 134.475,65.3 136.7,67.525 136.7,74.825

## Silkscreen, mask and mechanical layers (free items; w line width, h text height)
Top Overlay:
  lines w0.254: 169.3,66 182.05,66 ; 196.825,9.075 196.875,9.125
  text "F16" at 90.5,125.5 h1.52 r90
  text "F17" at 93.048,125.5 h1.52 r90
  text "G14" at 95.596,125.5 h1.52 r90
  text "G16" at 98.144,125.5 h1.52 r90
  text "H16" at 100.692,125.5 h1.52 r90
  text "H17" at 103.24,125.5 h1.52 r90
  text "J16" at 105.788,125.5 h1.52 r90
  text "H15" at 108.337,125.5 h1.52 r90
  text "L12" at 110.885,125.5 h1.52 r90
  text "H14" at 113.433,125.5 h1.52 r90
  text "K14" at 115.981,125.5 h1.52 r90
  text "K12" at 118.529,125.5 h1.52 r90
  text "K17" at 121.077,125.5 h1.52 r90
  text "K16" at 123.625,125.5 h1.52 r90
  text "H12" at 126.173,125.5 h1.52 r90
  text "L13" at 128.721,125.5 h1.52 r90
  text "L18" at 131.269,125.5 h1.52 r90
  text "L15" at 133.817,125.5 h1.52 r90
  text "K15" at 136.365,125.5 h1.52 r90
  text "L17" at 138.913,125.5 h1.52 r90
  text "L16" at 141.461,125.5 h1.52 r90
  text "M16" at 144.01,125.5 h1.52 r90
  text "L14" at 146.558,125.5 h1.52 r90
  text "M14" at 149.106,125.5 h1.52 r90
  text "P17" at 151.654,125.5 h1.52 r90
  text "P16" at 154.202,125.5 h1.52 r90
  text "N14" at 156.75,125.5 h1.52 r90
  text "3V3" at 159.25,125.45 h1.52 r90
  text "3V3" at 161.75,125.45 h1.52 r90
  text "GND" at 164.25,125.45 h1.52 r90
  text "C17" at 90.75,114.775 h1.52 r90
  text "C18" at 93.286,114.75 h1.52 r90
  text "D17" at 95.821,114.55 h1.52 r90
  text "D18" at 98.357,114.5 h1.52 r90
  text "E16" at 100.893,114.5 h1.52 r90
  text "E18" at 103.429,114.5 h1.52 r90
  text "F15" at 105.964,114.5 h1.52 r90
  text "F18" at 108.5,114.5 h1.52 r90
  text "F14" at 111.036,114.5 h1.52 r90
  text "G18" at 113.571,114.5 h1.52 r90
  text "G13" at 116.107,114.5 h1.52 r90
  text "H18" at 118.643,114.5 h1.52 r90
  text "H13" at 121.179,114.5 h1.52 r90
  text "J18" at 123.714,114.5 h1.52 r90
  text "J13" at 126.25,114.5 h1.52 r90
  text "K13" at 128.786,114.5 h1.52 r90
  text "K18" at 131.321,114.5 h1.52 r90
  text "M13" at 133.857,114.5 h1.52 r90
  text "M18" at 136.393,114.5 h1.52 r90
  text "N15" at 138.929,114.5 h1.52 r90
  text "N18" at 141.464,114.5 h1.52 r90
  text "N17" at 144,114.5 h1.52 r90
  text "P18" at 146.536,114.5 h1.52 r90
  text "N16" at 149.071,114.5 h1.52 r90
  text "T18" at 151.607,114.5 h1.52 r90
  text "U18" at 154.143,114.5 h1.52 r90
  text "P15" at 156.679,114.5 h1.52 r90
  text "T17" at 159.214,114.5 h1.52 r90
  text "U17" at 161.75,114.5 h1.52 r90
  text "GND" at 164.25,114.275 h1.52 r90
  text "NASCENCE" at 55.875,111.025 h5.5 r270
  text "A16" at 79.75,110 h1.52
  text "D14" at 69.25,109.75 h1.52
  text "M11" at 179.75,109.75 h1.52
  text "U16" at 169,109.5 h1.52
  text "A15" at 79.75,107.457 h1.52
  text "P12" at 179.75,107.25 h1.52
  text "C14" at 69.25,107.192 h1.52
  text "U15" at 169,107 h1.52
  text "A14" at 79.75,104.914 h1.52
  text "N11" at 179.75,104.75 h1.52
  text "F13" at 69.25,104.635 h1.52
  text "T14" at 169,104.25 h1.52
  text "A13" at 79.75,102.371 h1.52
  text "N10" at 179.75,102.25 h1.52
  text "E13" at 69.25,102.077 h1.52
  text "T13" at 169,101.75 h1.52
  text "B16" at 79.75,99.828 h1.52
  text "P11" at 179.75,99.75 h1.52
  text "F12" at 69.25,99.519 h1.52
  text "L16" at 169,99.25 h1.52
  text "E12" at 79.75,97.284 h1.52
  text "P8" at 179.75,97.25 h1.52
  text "V12" at 169,97 h1.52
  text "D12" at 69.25,96.962 h1.52
  text "C15" at 79.75,94.741 h1.52
  text "U10" at 179.7,94.75 h1.52
  text "T11" at 169,94.5 h1.52
  text "D11" at 69.25,94.404 h1.52
  text "A12" at 79.75,92.198 h1.52
  text "P3" at 169.85,92.025 h1.52
  text "P2" at 179.75,92 h1.52
  text "C11" at 69.25,91.846 h1.52
  text "B14" at 79.75,89.655 h1.52
  text "U2" at 179.75,89.5 h1.52
  text "F11" at 69.25,89.288 h1.52
  text "T2" at 169.85,89.275 h1.52
  text "C12" at 79.75,87.112 h1.52
  text "E11" at 69.25,86.731 h1.52
  text "E11" at 69.25,86.731 h1.52
  text "T1" at 179.75,86.75 h1.52
  text "U1" at 170.575,86.675 h1.52
  text "Mecobo v3.5" at 55.875,85.75 h5.5 r270
  text "C13" at 79.75,84.569 h1.52
  text "G11" at 69.25,84.173 h1.52
  text "P1" at 170.575,84.175 h1.52
  text "A11" at 79.75,82.026 h1.52
  text "GND" at 179.6,81.75 h1.52
  text "3V3" at 168.575,81.675 h1.52
  text "F10" at 69.25,81.615 h1.52
  text "B12" at 79.75,79.483 h1.52
  text "3V3" at 168.575,79.175 h1.52
  text "D9" at 69.25,79.058 h1.52
  text "GND" at 179.6,79 h1.52
  text "A10" at 79.75,76.94 h1.52
  text "F9" at 69.25,76.5 h1.52
  text "GND" at 179.6,76.5 h1.52
  text "3V3" at 169.25,76.425 h1.52
  text "B11" at 79.75,74.397 h1.52
  text "A9" at 79.75,71.853 h1.52
  text "C9" at 69.25,71.5 h1.52
  text "CLK" at 179.2,71.5 h1.52
  text "DON" at 169.225,71.45 h1.52
  text "C10" at 79.75,69.31 h1.52
  text "INB" at 169.35,68.975 h1.52
  text "DIN" at 179.2,68.95 h1.52
  text "G9" at 69.25,68.937 h1.52
  text "A8" at 79.75,66.767 h1.52
  text "PRB" at 169.2,66.45 h1.52
  text "D8" at 69.25,66.375 h1.52
  text "B9" at 79.75,64.224 h1.52
  text "H3" at 170.45,63.85 h1.52
  text "C8" at 69.25,63.812 h1.52
  text "A7" at 79.75,61.681 h1.52
  text "H9" at 179.25,61.432 h1.52
  text "C6" at 69.25,61.25 h1.52
  text "B8" at 79.75,59.138 h1.52
  text "H11" at 179.25,58.909 h1.52
  text "D6" at 69.25,58.687 h1.52
  text "H10" at 169.125,58.7 h1.52
  text "A6" at 79.75,56.595 h1.52
  text "J11" at 179.25,56.386 h1.52
  text "C4" at 69.25,56.125 h1.52
  text "C7" at 79.75,54.052 h1.52
  text "J10" at 169.475,53.65 h1.52
  text "B3" at 69.25,53.562 h1.52
  text "EU" at 55.875,52.5 h5.5 r270
  text "A5" at 79.75,51.509 h1.52
  text "B2" at 69.25,51 h1.52
  text "B6" at 79.75,48.966 h1.52
  text "3V3" at 67.75,48.5 h1.52
  text "A4" at 79.75,46.422 h1.52
  text "J6" at 179.25,46.295 h1.52
  text "3V3" at 67.75,46 h1.52
  text "K5" at 170.5,45.975 h1.52
  text "C5" at 79.75,43.879 h1.52
  text "H8" at 179.25,43.773 h1.52
  text "GND" at 67.75,43.5 h1.52
  text "L2" at 170.7,43.3 h1.52
  text "A3" at 79.75,41.336 h1.52
  text "L1" at 179.25,41.25 h1.52
  text "GND" at 67.75,41 h1.52
  text "K1" at 171.139,41 h1.52
  text "OR" at 55.875,40.925 h2
  text "B4" at 79.75,38.793 h1.52
  text "DP" at 179.125,38.65 h1.52
  text "VB" at 170.6,38.475 h1.52
  text "USB" at 165.425,37.35 h1.52
  text "A2" at 79.75,36.25 h1.52
  text "DM" at 170.65,35.95 h1.52
  text "1V2" at 120.325,19.525 h1.52
  text "1V8" at 120.325,16.85 h1.52
  text "3V3" at 120.325,14.175 h1.52
  text "GND" at 120.325,11.5 h1.52
Mechanical 1:
  lines w0.254: 51.775,138.925 51.775,9.075 196.825,9.075 ; 51.775,138.95 196.875,138.95 196.875,9.125

## Dimensions
175.375,132.225 to 75.375,132 on Top Overlay

## Text inside footprints (layer, text, board x,y; h text height)
HEast: Top Overlay "2" at 176.908,112.936 h1.27 r270; Top Overlay "1" at 174.368,112.936 h1.27 r270; Top Overlay "59" at 174.368,34.704 h1.27 r270; Top Overlay "60" at 176.908,34.704 h1.27 r270
HNorth: Top Overlay "60" at 165.568,122.428 h1.27; Top Overlay "59" at 165.568,119.888 h1.27; Top Overlay "1" at 87.336,119.888 h1.27; Top Overlay "2" at 87.336,122.428 h1.27
HWest: Top Overlay "2" at 76.908,112.936 h1.27 r270; Top Overlay "1" at 74.368,112.936 h1.27 r270; Top Overlay "59" at 74.368,34.704 h1.27 r270; Top Overlay "60" at 76.908,34.704 h1.27 r270
UCDBG: Top Overlay "2" at 154.36,15.432 h1.27; Top Overlay "1" at 154.36,12.892 h1.27; Top Overlay "19" at 181.284,12.892 h1.27; Top Overlay "20" at 181.284,15.432 h1.27